# Altium PCB keyboardV0.1.PcbDoc
Units mil, origin at the board's own origin, x right, y up, seen from the top; angles counter-clockwise.
Board outline 3182.68 x 2361.92 mil, 2 copper layers (Top Layer, Bottom Layer); 69 components, 50 nets, 268 pads, 64 vias.
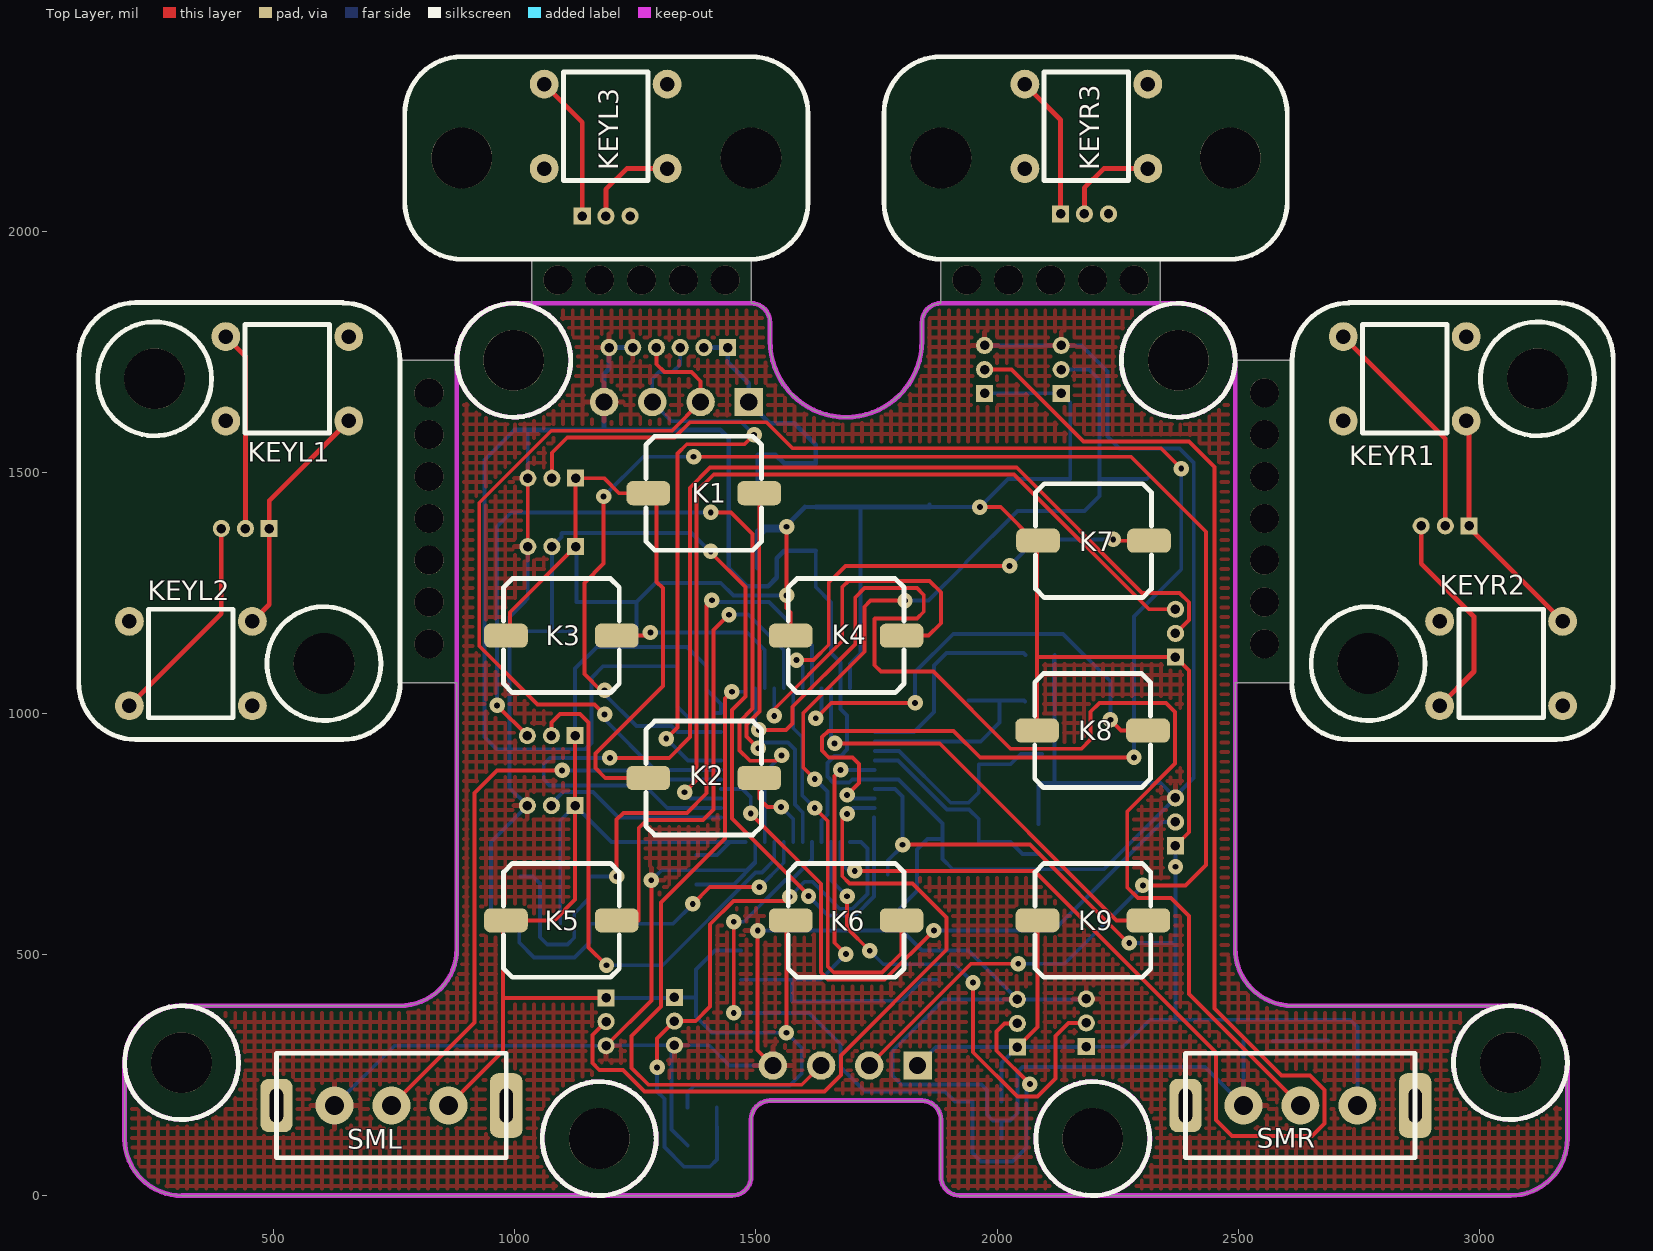
[diagram p0: Top Layer view]
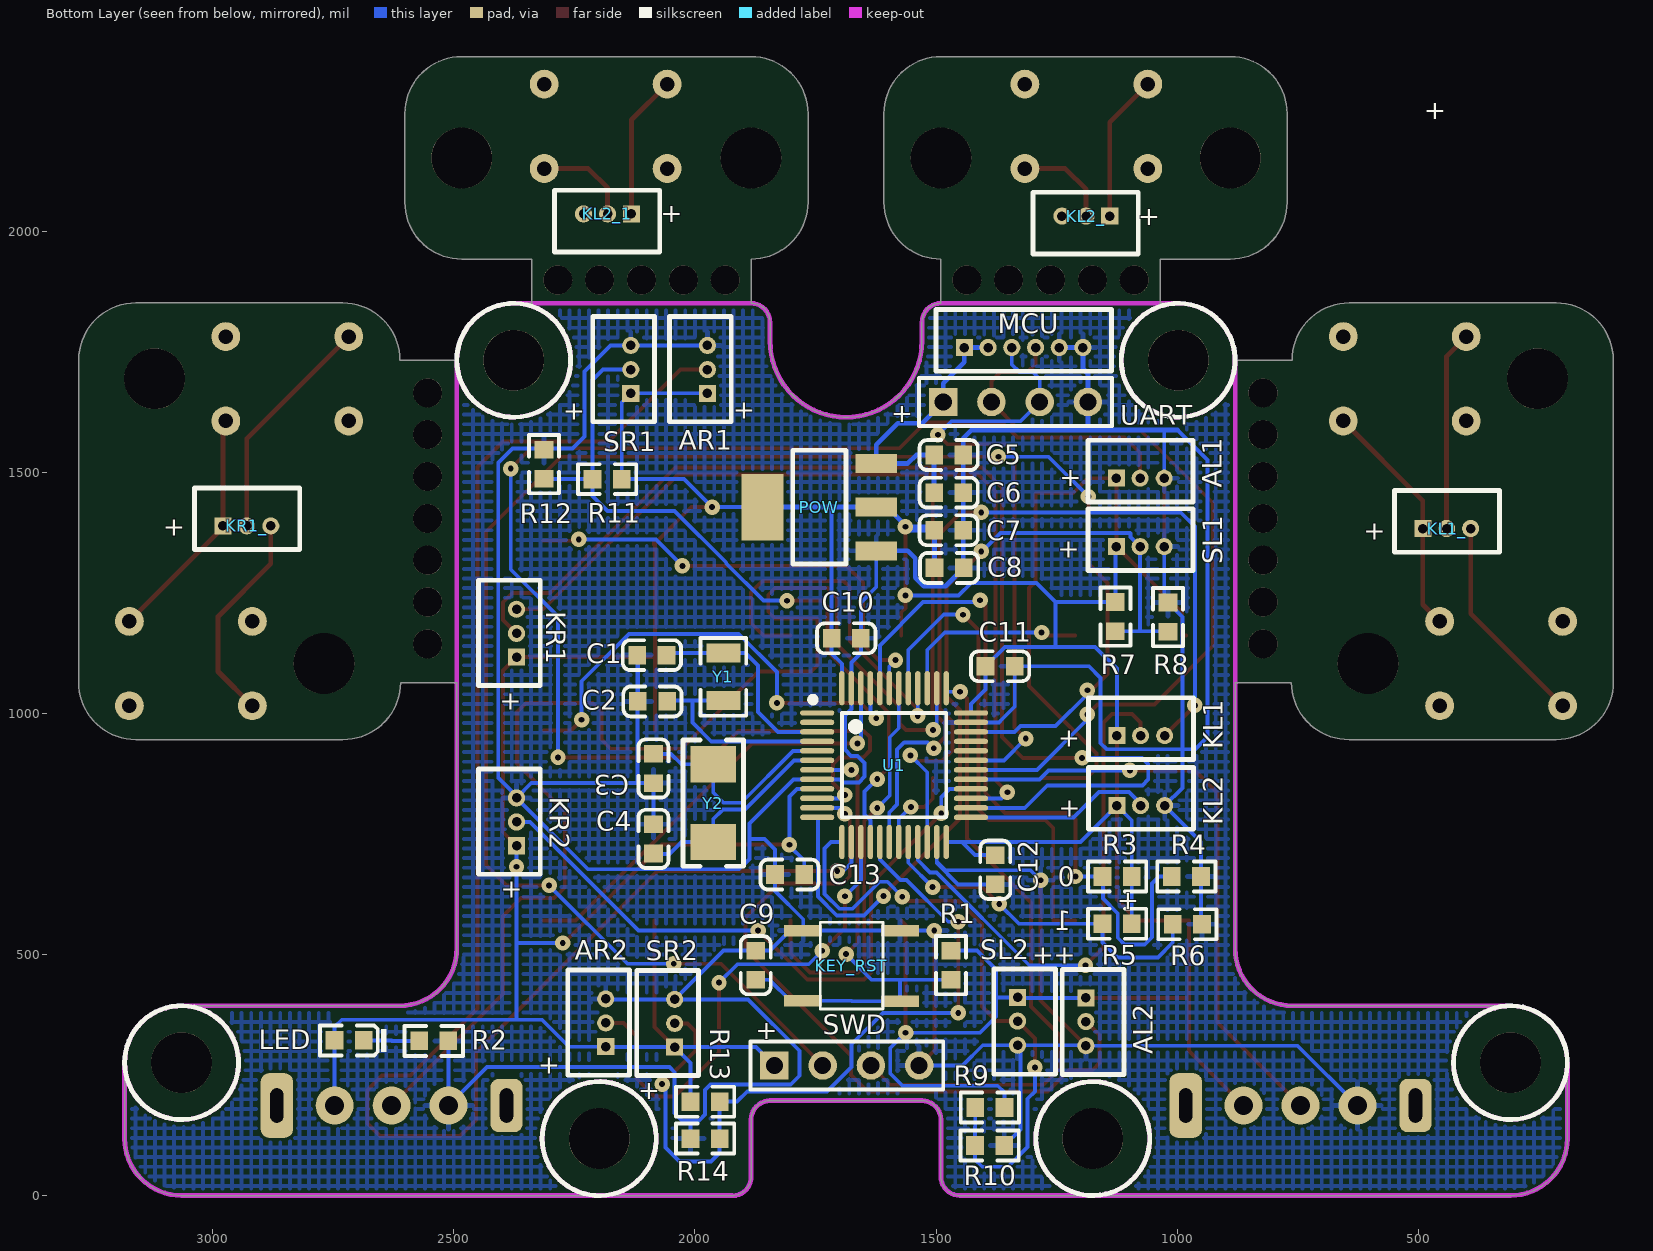
[diagram p1: Bottom Layer view, seen from below]
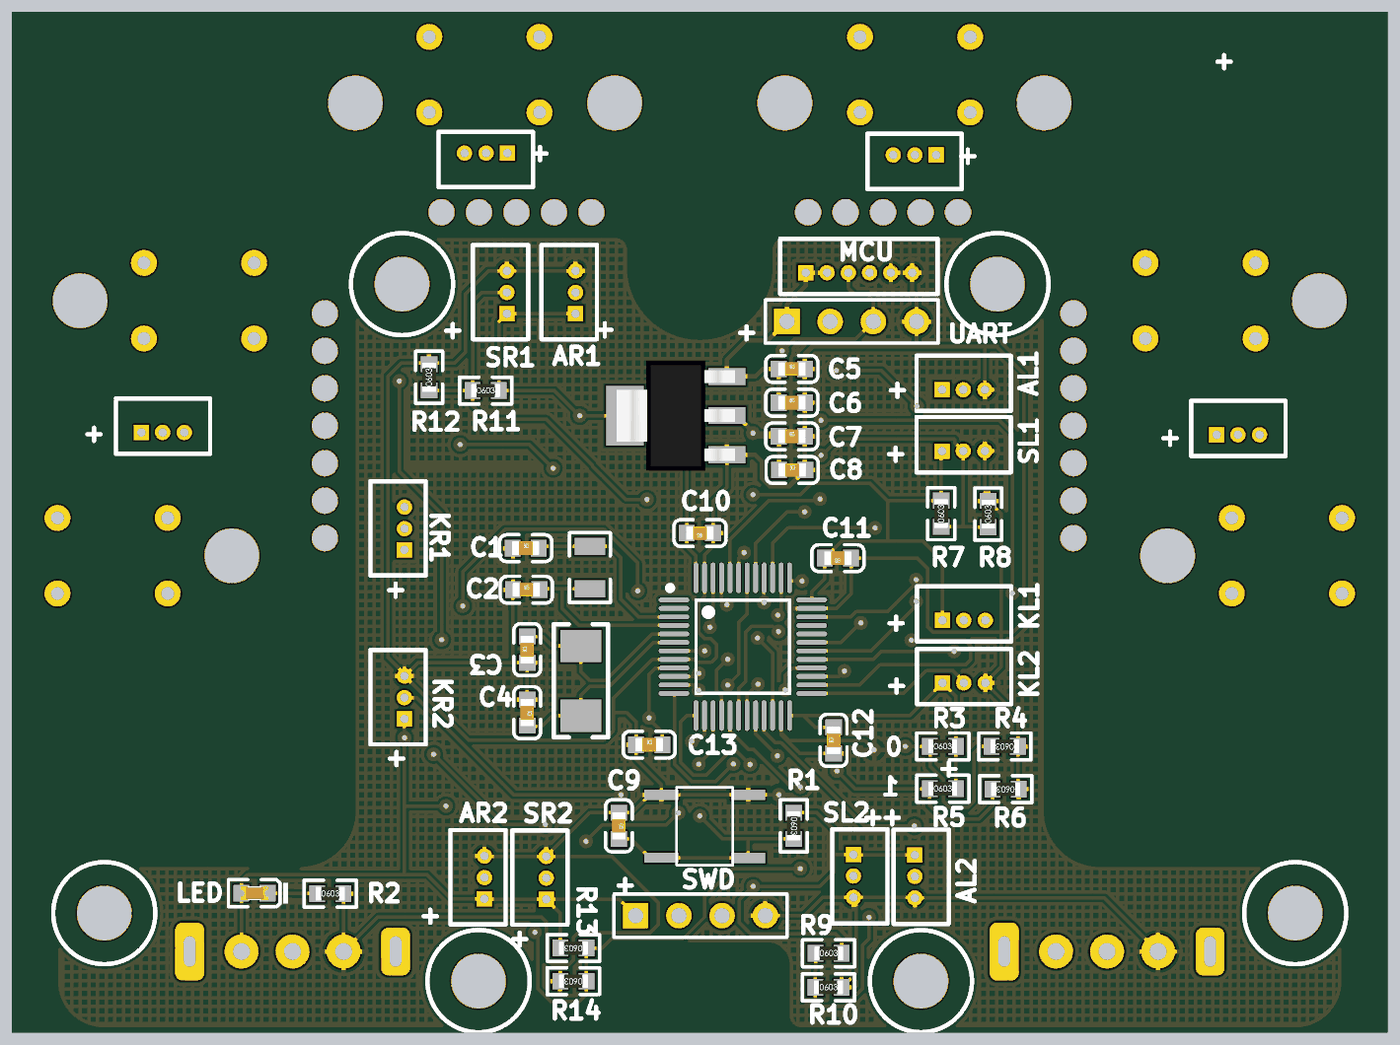
[diagram p2: 3D render of the assembled board from below, using the file's embedded part models]

## Layer stack, top to bottom
Top Solder: solder mask 0.4, Solder Resist, Dk 3.5
Top Layer: signal copper 1.4
Dielectric 1: dielectric 12.6, FR-4, Dk 4.8
Bottom Layer: signal copper 1.4
Bottom Solder: solder mask 0.4, Solder Resist, Dk 3.5

## Board outline
190.62,118.36 ccw(c308.73,118.36) 308.73,0.25 1450.46,0.25 ccw(c1450.46,39.62) 1489.83,39.62 1489.83,157.73 cw(c1529.2,157.73) 1529.2,197.1 1844.16,197.1 cw(c1844.16,157.73) 1883.53,157.73 1883.53,39.62 ccw(c1922.9,39.62) 1922.9,0.25 3064.63,0.25 ccw(c3064.63,118.36) 3182.74,118.36 3182.74,275.84 ccw(c3064.63,275.84) 3064.63,393.95 2611.88,393.95 cw(c2611.88,512.06) 2493.77,512.06 2493.77,1064 2493.87,1064.11 2610.36,1064.11 ccw(c2729.23,1064.87) 2729.99,946 3159.91,946 ccw(c3159.46,1064.55) 3278.02,1065 3278.02,1733.16 ccw(c3159.47,1732.97) 3159.28,1851.51 2729.99,1851.51 ccw(c2730.42,1732.97) 2611.88,1732.53 2493.77,1732.53 ccw(c2375.66,1732.53) 2375.66,1850.64 2338.61,1850.64 2338.61,1942.17 2483.53,1942.17 ccw(c2483.53,2060.28) 2601.64,2060.28 2601.64,2244 ccw(c2483.5,2244.03) 2483.53,2362.17 1883.53,2362.17 ccw(c1883.53,2244.06) 1765.42,2244.06 1765.42,2060.28 ccw(c1883.53,2060.28) 1883.53,1942.17 1883.53,1850.64 ccw(c1883.53,1811.27) 1844.16,1811.27 1844.16,1771.9 cw(c1686.68,1771.9) 1529.2,1771.9 1529.2,1811.27 ccw(c1489.83,1811.27) 1489.83,1850.64 1489.83,1942.17 ccw(c1489.83,2060.28) 1607.94,2060.28 1607.94,2244.06 ccw(c1489.83,2244.06) 1489.83,2362.17 889.83,2362.17 ccw(c889.86,2244.03) 771.72,2244 771.72,2060.28 ccw(c889.83,2060.28) 889.83,1942.17 1034.75,1942.17 1034.75,1850.64 997.7,1850.64 ccw(c997.7,1732.53) 879.59,1732.53 761.48,1732.53 ccw(c642.94,1732.97) 643.37,1851.51 214.08,1851.51 ccw(c213.89,1732.97) 95.34,1733.16 95.34,1065 ccw(c213.9,1064.55) 213.45,946 643.37,946 ccw(c644.13,1064.87) 763,1064.11 879.49,1064.11 879.49,512.17 879.59,512.06 cw(c761.48,512.06) 761.48,393.95 308.73,393.95 ccw(c308.73,275.84) 190.62,275.84

## Design rules (kind name [scope] priority, off if disabled: settings)
Clearance [All] p1: gap=6 ignorepadtopadclearanceinfootprint=FALSE
ComponentClearance [All] p1 off: gap=10 collisioncheckmode=3 verticalgap=10 showdistances=FALSE
HoleToHoleClearance [All] p1 off: gap=10 allowstackedmicrovias=TRUE
MinimumSolderMaskSliver [All] p1 off: minsoldermaskwidth=10
PolygonConnect [All] p1: connectstyle=Relief reliefconductorwidth=10 reliefentries=4 polygonreliefangle="90 Angle" airgapwidth=10
RoutingVias [All] p1: holewidth=12 width=32 viastyle="Through Hole" minholewidth=12 minwidth=32 maxholewidth=28 maxwidth=50
SilkToSilkClearance [All] p1 off: silktosilkclearance=10
SilkToSolderMaskClearance [IsPad] p1 off: minsilkscreentomaskgap=10 clearancetoexposedcopper=TRUE
SolderMaskExpansion [All] p1: expansion=4
UnRoutedNet [All] p1: checkbadconnections=TRUE
Width [All] p1: maxlimit=10 minlimit=6 preferedwidth=8
24 further rules are at their usual default settings.

## Classes and differential pairs
component class keyboardV0.0: AL1 AL2 AR1 AR2 C1 C2 C3 C4 C5 C6 C7 C8 C9 C10 C11 C12 C13 K1 K2 K3 K4 K5 K6 K7 K8 K9 KEY_RST KL1 KL2 KR1 KR2 LED MCU POW R1 R2 R3 R4 R5 R6 R7 R8 R9 R10 R11 R12 R13 R14 SL1 SL2 SML SMR SR1 SR2 SWD U1 UART Y1 Y2

## Components (designator, comment, footprint, x,y, rotation, side; value= is the part's Value field where it differs from the comment)
AL1 "SH1.25mm_3P" SH1.25mm_3P 1026.79,1488 r0 bottom locked
AL2 "SH1.25mm_3P" SH1.25mm_3P 1189,311 r90 bottom
AR1 "SH1.25mm_3P" SH1.25mm_3P 1974,1763.21 r270 bottom
AR2 "SH1.25mm_3P" SH1.25mm_3P 2185,408.21 r270 bottom
C1 "10PF" 0603_C 2089.32,1121 r180 bottom
C2 "10PF" 0603_C 2088,1025 r180 bottom
C3 "10PF" 0603_C 2086,886 r90 bottom
C4 "10PF" 0603_C 2086,740 r270 bottom
C5 "4.7uF" 0603_C 1473.68,1536 r180 bottom
C6 "104" 0603_C 1473.68,1458 r180 bottom
C7 "4.7uF" 0603_C 1473.68,1380 r180 bottom
C8 "104" 0603_C 1472.68,1302 r180 bottom
C9 "104" 0603_C 1874,478 r270 bottom
C10 "104" 0603_C 1686.21,1156 r0 bottom
C11 "104" 0603_C 1367,1098 r0 bottom
C12 "104" 0603_C 1377,676 r90 bottom
C13 "104" 0603_C 1803.68,666 r180 bottom
K1 "KEY_S_6*6" KEY_S_6*6 1276.73,1456.81 r0 top locked
K2 "KEY_S_6*6" KEY_S_6*6 1276.73,866.26 r0 top locked
K3 "KEY_S_6*6" KEY_S_6*6 981.46,1161.54 r0 top locked
K4 "KEY_S_6*6" KEY_S_6*6 1572.01,1161.54 r0 top locked
K5 "KEY_S_6*6" KEY_S_6*6 981.46,571 r0 top locked
K6 "KEY_S_6*6" KEY_S_6*6 1572,571 r0 top locked
K7 "KEY_S_6*6" KEY_S_6*6 2085,1358.39 r0 top locked
K8 "KEY_S_6*6" KEY_S_6*6 2083,964.68 r0 top locked
K9 "KEY_S_6*6" KEY_S_6*6 2083.82,571 r0 top locked
KEY_RST "KEY_SMT" KEY_SMT 1675,477 r180 bottom
KEYL1 "KEY" KEY_6*6#1 400.44,1781.64 r0 top locked
KEYL2 "KEY" KEY_6*6#1 200.42,1191.08 r0 top locked
KEYL3 "KEY" KEY_6*6#1 1060.83,2305.17 r0 top locked
KEYR1 "KEY" KEY_6*6#2 2972.92,1781.64 r180 top locked (schematic designator KEYL1)
KEYR2 "KEY" KEY_6*6#2 3172.94,1191.08 r180 top locked (schematic designator KEYL2)
KEYR3 "KEY" KEY_6*6#2 2312.53,2305.17 r180 top locked (schematic designator KEYL3)
KL1 "SH1.25mm_3P" SH1.25mm_3P 1025.79,954 r0 bottom locked
KL1_ "SH1.25mm_3P" SH1.25mm_3P 391.22,1383.64 r0 bottom locked
KL2 "SH1.25mm_3P" SH1.25mm_3P 1025.79,809 r0 bottom locked
KL2_ "SH1.25mm_3P" SH1.25mm_3P 1238.88,2031.6 r180 bottom locked
KL2_1 "SH1.25mm_3P" SH1.25mm_3P 2231.07,2036 r180 bottom locked (schematic designator KL2_)
KR1 "SH1.25mm_3P" SH1.25mm_3P 2370,1216.21 r270 bottom
KR1_ "SH1.25mm_3P" SH1.25mm_3P 2879.54,1389.03 r0 bottom locked
KR2 "SH1.25mm_3P" SH1.25mm_3P 2370,825 r270 bottom locked
LED "0603_LED" 0603_LED 2717,322 r0 bottom
MCU "SH1.25mm_6P" SH1.25MM_6P 1195.24,1759 r0 bottom
POW "AMS1117_3.3" SOT223 1742,1428 r180 bottom
R1 "10K" 0603_R 1469,478 r270 bottom
R2 "680R" 0603_R 2541.69,321 r180 bottom
R3 "100K" 0603_R 1124.32,662 r180 bottom
R4 "100K" 0603_R 980.68,662 r0 bottom
R5 "100K" 0603_R 1124.31,564 r180 bottom
R6 "100K" 0603_R 978.69,563 r0 bottom
R7 "10K" 0603_R 1128,1201 r90 bottom
R8 "10K" 0603_R 1019,1200 r90 bottom
R9 "10K" 0603_R 1388.32,183 r180 bottom
R10 "10K" 0603_R 1388.79,104 r180 bottom
R11 "10K" 0603_R 2182,1486 r180 bottom
R12 "10K" 0603_R 2313,1517 r90 bottom
R13 "10K" 0603_R 1979,195 r0 bottom
R14 "10K" 0603_R 1979,118.36 r0 bottom
SL1 "SH1.25mm_3P" SH1.25mm_3P 1026.79,1346 r0 bottom locked
SL2 "SH1.25mm_3P" SH1.25mm_3P 1331,312 r90 bottom
SML "SWITCH" SWITCH_SS12F44 982.11,187 r180 top locked
SMR "SWITCH" SWITCH_SS12F44 2867,187 r180 top locked
SR1 "SH1.25mm_3P" SH1.25mm_3P 2133,1763.21 r270 bottom
SR2 "SH1.25mm_3P" SH1.25mm_3P 2042,407.21 r270 bottom
SWD "Header_2.54_4P" HDR1_4P 1835,270 r180 bottom
U1 "STM32F103C8T6" LQFP48 1587,889 r180 bottom locked
UART "Header_2.54_4P" HDR1_4P 1485,1646 r180 bottom
Y1 "32.768K" XTAL_32.768_3215_2 1941,1076 r90 bottom
Y2 "8Mhz" XTAL_5032_2 1962,814 r90 bottom

## Footprints (in the part's own frame and the unit in brackets; to place one, negate y for a bottom-side part, rotate by r counter-clockwise, add the part's x,y. Pads: shape width x height; smd on the part's side, far side on the other; paste and mask are expansions set on the pad)
0603_C [mm]
  rect 0.93x0.98 smd: 1(-0.77,0) 2(0.77,0)
  silkscreen extent -1.53,-0.79 1.54,0.79, body extent -0.8,-0.4 0.8,0.4, height 0.3
0603_LED [mm]
  rect 0.93x0.98 smd: A(0.77,0) K(-0.77,0)
  silkscreen extent -1.98,-0.79 1.54,0.79, body extent -0.8,-0.4 0.8,0.4, height 0.6
0603_R [mm]
  rect 0.93x0.98 smd: 1(-0.77,0) 2(0.77,0)
  silkscreen extent -1.54,-0.79 1.54,0.79, body extent -0.85,-0.4 0.85,0.4, height 0.56
HDR1_4P [mm]
  rect 1.5x1.5 hole 0.9: 1(0,0)
  round 1.5 hole 0.9: 2(2.54,0) 3(5.08,0) 4(7.62,0)
  silkscreen extent -1.27,-1.27 8.89,1.27
KEY_6*6#1 [mil]
  round 60 hole 30: 1(0,0) 2(255,0) 3(0,-175) 4(255,-175)
  silkscreen extent 40,-200 215,25
KEY_6*6#2 [mil]
  round 60 hole 30: 1(0,0) 2(255,0) 3(0,175) 4(255,175)
  silkscreen extent 40,-25 215,200
KEY_S_6*6 [mm]
  rrect50% 2.3x1.27 smd: 1(0,0) 2(5.842,0)
  silkscreen extent -0.13,-3 5.97,3
KEY_SMT [mm]
  rect 2x0.6 smd: 1(-2.55,-1.85) 1(2.55,-1.87) 2(-2.55,1.85) 2(2.55,1.85)
  silkscreen extent -1.65,-2.29 1.65,2.29
LQFP48 [mm]
  oval 1.8x0.28 smd mask+0.051: 1(-4.05,2.85) 2(-4.05,2.35) 3(-4.05,1.85) 4(-4.05,1.35) 5(-4.05,0.85) 6(-4.05,0.35) 7(-4.05,-0.15) 8(-4.05,-0.65) 9(-4.05,-1.15) 10(-4.05,-1.65) 11(-4.05,-2.15) 12(-4.05,-2.65) 25(4.05,-2.65) 26(4.05,-2.15) 27(4.05,-1.65) 28(4.05,-1.15) 29(4.05,-0.65) 30(4.05,-0.15) 31(4.05,0.35) 32(4.05,0.85) 33(4.05,1.35) 34(4.05,1.85) 35(4.05,2.35) 36(4.05,2.85)
  oval 0.28x1.8 smd mask+0.051: 13(-2.75,-3.95) 14(-2.25,-3.95) 15(-1.75,-3.95) 16(-1.25,-3.95) 17(-0.75,-3.95) 18(-0.25,-3.95) 19(0.25,-3.95) 20(0.75,-3.95) 21(1.25,-3.95) 22(1.75,-3.95) 23(2.25,-3.95) 24(2.75,-3.95) 37(2.75,4.15) 38(2.25,4.15) 39(1.75,4.15) 40(1.25,4.15) 41(0.75,4.15) 42(0.25,4.15) 43(-0.25,4.15) 44(-0.75,4.15) 45(-1.25,4.15) 46(-1.75,4.15) 47(-2.25,4.15) 48(-2.75,4.15)
  silkscreen extent -4.43,-2.65 2.75,3.7
SH1.25mm_3P [mm]
  rect 0.9x0.9 hole 0.5: 1(2.52,0)
  round 0.9 hole 0.5: 2(1.27,0) 3(0,0)
  silkscreen extent -1.52,-2 4.02,1.25
SH1.25MM_6P [mm]
  rect 0.9x0.9 hole 0.5: 1(6.25,0)
  round 0.9 hole 0.5: 2(5,0) 3(3.75,0) 4(2.5,0) 5(1.25,0) 6(0,0)
  silkscreen extent -1.5,-2 7.75,1.25
SOT223 [mm]
  rect 2.2x1 smd: 1(3,-2.3) 2(3,0) 3(3,2.3)
  rect 2.2x3.5 smd: 2(-3,0)
  silkscreen extent -1.4,-3 1.4,3, body extent -3.49,-3.24 3.49,3.24, height 1.64
SWITCH_SS12F44 [mm]
  rrect50% 1.7x3.4 hole 0.7 slot 1.8 at 90 deg: 0(0,0)
  rrect50% 1.7x2.8 hole 0.7 slot 1.8 at 90 deg: 0(12.1,0)
  round 2 hole 1: 1(3.045,0) 2(6.045,0) 3(9.045,0)
  silkscreen extent 0,-2.75 12.1,2.75
XTAL_32.768_3215_2 [mm]
  rect 1x1.8 smd: 1(-1.25,0) 2(1.25,0)
  silkscreen extent -2.05,-1.2 2.05,1.2
XTAL_5032_2 [mm]
  rect 1.9x2.4 smd: 1(-2.05,0) 2(2.05,0)
  silkscreen extent -3.33,-1.6 3.33,1.6

## Part data
C1 C2 C3 C4 C5 C6 C7 C8 C9 C10 C11 C12 C13: library part 0603_CAP
KEYL1 KEYL2 KEYL3 KEYR1 KEYR2 KEYR3: library part KEY_6*6
R1 R2 R3 R4 R5 R6 R7 R8 R9 R10 R11 R12 R13 R14: library part 0603_RES
SML SMR: library part SWITCH_SS12F44
Y1: library part XTAL_32.768_3215_2
Y2: library part XTAL_8MHz_5032_2

## Free pads (board coordinates)
  round 125.98 hole 125.98: 0(252.82,1694.03) 0(308.73,275.84) 0(604,1103.48) 0(889.83,2152.17) 0(997.7,1732.53) 0(1174.87,118.36) 0(1489.83,2152.17) 0(1883.53,2152.17) 0(2198.49,118.36) 0(2375.66,1732.53) 0(2483.53,2152.17) 0(2769.36,1103.48) 0(3064.63,275.84) 0(3120.54,1694.03)
  round 60 hole 60: 0(822,1144.38) 0(822,1231.15) 0(822,1317.92) 0(822,1404.69) 0(822,1491.46) 0(822,1578.23) 0(822,1665) 0(1089,1899) 0(1175.77,1899) 0(1262.54,1899) 0(1349.31,1899) 0(1436.08,1899) 0(1937.28,1899) 0(2024.05,1899) 0(2110.82,1899) 0(2197.59,1899) 0(2284.36,1899) 0(2554.28,1144.38) 0(2554.28,1231.15) 0(2554.28,1317.92) 0(2554.28,1404.69) 0(2554.28,1491.46) 0(2554.28,1578.23) 0(2554.28,1665)

## Via types
v1: diameter 32, hole 12, Top Layer to Bottom Layer, tented both sides, 64 vias

## Nets (pads, with @x,y where several pads share a name; then routed paths per layer and width w, separated by ;. In a path a pad name is that pad's centre, name@x,y a point inside that pad or via, vN(x,y) a via of type N, cw(c..) or ccw(c..) an arc to the next point about the centre after c; other vN are vias at no path point)
3V3: AL1.1 AL2.1 AR1.1 AR2.1 C7.1 C8.1 C10.2 C11.2 C12.2 C13.2 K1.1 K2.1 K3.1 K4.1 K5.1 K6.1 K7.1 K8.1 K9.1 KL1.1 KL2.1 KR1.1 KR2.1 LED.A POW.2 R1.1 R3.2 R5.2 R7.2 R9.2 R11.2 R13.2 SL1.1 SL2.1 SML.1 SMR.1 SR1.1 SR2.1 SWD.1 U1.9 U1.24 U1.36 U1.48 | length 11635.3
  Top Layer w8: SML.1 975,299.78 975,411 ; K3.1 990,1161.54 990,1210 SL1.1 AL1.1 1185,1488 1216.19,1456.81 K1.1 1294,1456.81 1294,1273 1307,1260 1307,1057 1167,917 1167,886.76 1187.5,866.26 K2.1 ; KL1.1 KL2.1 1125,614 1082,571 K5.1 975,571 975,411 ; AL2.1 975.79,410.21 975,411 ; v1(1563,338) 1563,562 K6.1 ; v1(1563.5,1387.5) v1(1563.5,1245) 1563.5,1218.5 1572.01,1209.99 K4.1 ; v1(1804,728) 2068,728 2272,524 v1(2274,524) ; v1(1964.5,1428) 2007.5,1428 K7.1@2083,1352.5 ; SR2.1 2083.82,349.82 K9.1 ; K8.1 2083,1117 ; K7.1@2083,1358.39 K7.1@2083,1352.5 ; K7.1 2085,1350.5 K7.1@2083,1352.5 ; KR2.1 2398,753.79 2398,1089 KR1.1 2083,1117 ; 2083,1117 K7.1@2083,1352.5
  Bottom Layer w8: R5.2 R3.2 1094,778 KL2.1 1200.51,733.49 1446.49,733.49 ; KL1.1 1125,1093 1170,1138 1252,1138 ; SL1.1 1128,1344 R7.2 1252,1231.32 ; AL2.1 1322,410.21 1323,411.21 SL2.1 1375.79,411.21 ; R9.2 1358,214 1372,228 1569.5,228 1595,253.5 1595,306 v1(1563,338) ; C12.2 1419.32,706.32 1446.49,733.49 ; U1.36@1413,1001.2 U1.36 1427.55,1019.45 1397.32,1049.69 C11.2 1357.32,1138 1252,1138 ; R1.1 1415.31,508.31 1375.79,468.79 1375.79,411.21 ; U1.24 1446.49,733.49 ; C8.1 C7.1@1503,1362.5 ; C7.1@1503,1379 C7.1 ; C7.1@1515.5,1375 C7.1@1503,1362.5 ; v1@1562.5,349 1562.5,338.5 v1(1563,338) ; v1(1563.5,1245) 1453,1245 1427,1271 1291.68,1271 1252,1231.32 ; v1(1563.5,1387.5) 1515.5,1387.5 1503,1375 C7.1@1503,1362.5 ; POW.2@1601,1428 POW.2@1623.89,1428 ; U1.48 1695.27,1103.27 1716.53,1124.53 C10.2 1716.53,1428 ; C13.2 1773.37,694.86 1804,725.49 1804,828 1788.28,843.72 U1.9 1789.19,842.81 ; SWD.1 1873,308 SR2.1 ; POW.2@1860.11,1434 1860.11,1428 v1(1964.5,1428) 2022.5,1486 R11.2 2151.68,1645.32 SR1.1 AR1.1 ; R13.2 2009.32,275.32 SR2.1 ; v1(2274,524) 2369,524 2370,525 ; KR2.1 v1(2370,682) 2370,525 ; SMR.1 2747.11,254 2747.32,254.21 LED.A 2747.32,350 2732.32,365 2370,365 ; 1252,1138 1252,1231.32 ; 1375.79,411.21 1375.79,371.21 1409,338 v1(1563,338) ; SR2.1 2184,308 AR2.1 2261,309 2317,365 2370,365 ; 2370,365 2370,525
  Bottom Layer w10: C8.1 C7.1@1503,1379 ; C7.1 1553,1380 POW.2@1601,1428 ; POW.2@1623.89,1428 POW.2@1860.11,1428
5V: C5.1 C6.1 MCU.1 MCU.2 POW.3 UART.1 | length 599.7
  Bottom Layer w10: MCU.2 MCU.1 1441.3,1728.7 1485,1685 UART.1 1529,1602 1579,1602 1623.89,1557.11 POW.3 1558.45,1518.55 1541,1536 C5.1 C6.1
AL1: AL1.2 U1.10 | length 2989.9
  Top Layer w8: AL1.2 1076.79,1540.79 1108.5,1572.5 1331.3,1572.5 1362.8,1604 1522,1604 1576,1550 2340,1550 v1(2382,1508) ; v1(1689,831) 1713.85,855.85 1713.85,895.25 1700,909.09 1650.91,909.09 1637,923 1637,951 1650,964 1910,964 1965,909 v1(2284,909)
  Bottom Layer w8: v1(1689,831) 1695.96,824.04 U1.10 ; v1(2284,909) 2284,1201 2382,1299 v1(2382,1508)
AL2: AL2.2 U1.11 | length 1516.4
  Top Layer w8: AL2.2 1161,333 1161,275 1175,261 1224.01,261 1269.01,216 1642,216 1676,250 1676,291 1895,510 1895,577 1824.76,647.24 1694.26,647.24 1679,662.5 1679,781.85 v1(1689,791.85)
  Bottom Layer w8: v1(1689,791.85) 1701.5,804.35 U1.11
AL3: R7.1 R8.1 SL1.2 U1.12 | length 1800.9
  Top Layer w8: v1(1406,1336.25) 1406,1334.5 1478.5,1262 1478.5,1035.47 1450.09,1007.07 1450.09,782.16 1608.85,623.41 v1(1608.85,621.39)
  Bottom Layer w8: R8.1 1074,1170.69 1076.79,1170.69 ; R7.1 1076.79,1170.69 ; v1(1406,1336.25) 1404.25,1336.25 1366.5,1374 1097.79,1374 1096.79,1373 1096.79,1366 SL1.2 1076.79,1170.69 ; v1(1608.85,621.39) 1649.24,581 1705.8,581 1745,620.2 U1.12@1745,784.67
AL4: R9.1 R10.1 SL2.2 U1.13 | length 1341.3
  Top Layer w8: v1(1570,620) 1561,611 1453,611 1405,563 1405,392 1375,362 SL2.2 1295,326 v1(1295,266) ; v1(1295,266) 1295,258 1303,266 v1(1295,266)
  Bottom Layer w8: v1(1295,266) 1295,216 1310,201 1310,100.73 1350.73,60 1404.1,60 1419.1,75 R10.1 1419.1,143 1418.63,143.47 R9.1 ; v1(1570,620) 1601,651 1617.3,651 1673.3,595 1700,595 1731,626 1731,720 1717.51,733.49 U1.13
AR1: AR1.2 U1.14 | length 3424.6
  Top Layer w8: v1(1705,673.5) 2077.5,673.5 2454,297 2454,157 2487,124 2653,124 2679,150 2679,219 2649,249 2590,249 2451,388 2451,1511 2398,1564 2179,1564 2029.79,1713.21 AR1.2
  Bottom Layer w8: U1.14 1675.58,690.42 1692.5,673.5 v1(1705,673.5)
AR2: AR2.2 U1.15 | length 1032.5
  Top Layer w8: v1(1689,621) 1689,555 v1(1736,508) ; v1(1950,442) 1950,297.5 2042,205.5 2083.5,205.5 2120.81,242.81 2120.81,331.03 2148,358.21 AR2.2
  Bottom Layer w8: U1.15 1655.9,654.1 v1(1689,621) ; v1(1736,508) 1764,480 1912,480 v1(1950,442)
AR3: R11.1 R12.1 SR1.2 U1.16 | length 1580.3
  Top Layer w8: v1(1622,864) 1598,888 1598,1001 1725,1128 1725,1221.5 1737.5,1234 v1(1809,1234)
  Bottom Layer w8: v1(1622,864) 1648,838 1648,790.5 1636.21,778.71 U1.16 ; v1(1809,1234) 1858,1234 1935,1311 1935,1312.77 2042.23,1420 2181,1420 2212.31,1451.31 R11.1 ; SR1.2 2190.79,1713.21 2212.31,1691.69 R11.1 ; R12.1@2313,1489 2310,1486 R11.1
AR4: R13.1 R14.1 SR2.2 U1.17 | length 1599.5
  Top Layer w8: v1(1454,379) v1(1454,568) ; SR2.2 2015.49,357.21 1999,340.72 1999,300.5 v1(2068,231.5)
  Bottom Layer w8: v1(1454,379) 1610,379 1675,314 1675,267 1726,216 1891.5,216 1912.5,195 R13.1 R14.1 1948.69,88.81 1966.5,71 2032,71 2061,100 2061,224.5 v1(2068,231.5) ; v1(1454,568) 1474.5,568 1561.5,655 1574,655 1616.53,697.53 U1.17
BOOT0: R3.1 R4.2 U1.44 | length 1505.6
  Top Layer w8: v1(1211,662) 1211,780 1225,794 1357,794 1397.5,834.5 1397.5,1224 v1(1408.5,1235)
  Bottom Layer w8: R4.2 1037.5,662 1052,647.5 1052,536 1067,521 1109,521 1123,535 1123,585 1154,616 R3.1@1154,662 ; R3.1 v1(1211,662) ; v1(1408.5,1235) 1412.5,1231 1526.77,1231 1616.53,1141.24 U1.44
BOOT1: R5.1 R6.2 U1.20 | length 746.6
  Top Layer w8: v1(1369,605) 1404,640 v1(1507,640)
  Bottom Layer w8: R6.2 1009,525 1040,494 1123.63,494 1154.63,525 R5.1 1328,564 v1(1369,605) ; v1(1507,640) 1557.47,690.47 U1.20
GND: AL1.3 AL2.3 AR1.3 AR2.3 C1.1 C2.1 C3.1 C4.1 C5.2 C6.2 C7.2 C8.2 C9.1 C10.1 C11.1 C12.1 C13.1 KEY_RST.2 KL2.3 KR2.3 MCU.5 MCU.6 POW.1 R2.2 R4.1 R6.1 R8.2 R10.2 R12.2 R14.2 SL1.3 SL2.3 SML.3 SMR.3 SR1.3 SR2.3 SWD.4 U1.8 U1.23 U1.35 U1.47 UART.4 | length 12258.1
  Top Layer w8: SL1.3 AL1.3 ; AL2.3 1283,405 v1(1283,654) ; v1(1503.5,549.83) 1503.5,301.5 SWD.4
  Bottom Layer w8: SML.3 750,311 AL2.3 1197,311 1198,312 SL2.3 ; R6.1 950.37,563 R4.1 950.37,733.58 KL2.3 989,845.79 989,926 ; 999,1588 937,1526 937,951 962,926 989,926 ; SL1.3 1026.79,1238.1 R8.2 989,1200.32 989,926 ; AL1.3 1026.79,1586.79 1028,1588 ; v1(1283,654) 1303.83,674.83 1479.83,674.83 1498.42,693.42 U1.23 1498.42,689.67 1454.43,645.69 C12.1 ; R10.2 1325,137.47 1325,306 SL2.3 ; U1.35 1369.48,981.52 1362,989 1336.69,1014.32 C11.1 1183,1098 1159,1074 1159,938.42 1146.58,926 989,926 ; C5.2@1442.37,1541.63 C8.2 C8.2@1443.37,1303 ; v1(1503.5,549.83) 1574.61,549.83 KEY_RST.2@1775.39,549.83 ; SWD.4 1445,270 1403,312 SL2.3 ; POW.1 1623.89,1262.01 1655.9,1230 C10.1 1655.9,1125.1 1675.58,1105.42 U1.47 1675.58,1009.28 1689,995.86 1689,925 1676,912 1662.5,912 1648,897.5 1648,869.09 1660,857.09 1693.36,857.09 1699.67,863.41 U1.8 1795.59,863.41 1887,772 1887,740 ; AR1.3 SR1.3 2175.1,1763.21 2229,1709.31 2229,1574.5 2253.87,1549.63 2378,1549.63 2408,1519.63 2408,867.38 2367.81,827.19 2339.31,855.69 C3.1 2086,817 C4.1 ; R14.2 2009.32,155.68 2009,156 ; 2119,857.09 2119,1024.31 C2.1 2118.31,1119.68 C1.1 2119.63,978.37 ; AR2.3 2184,407.21 SR2.3 ; KR2.3 2222,677 1908,677 1887,698 1887,740 ; R2.2 2511.37,253.48 2510.89,253 SMR.3 2430.89,267 2053,267 2042,256 2042,171 2027,156 2009,156 ; KEY_RST.2@1775.39,549.83 1775.39,573.39 1834,632 C13.1 1834,718 1856,740 1887,740 ; KEY_RST.2@1775.39,549.83 1803,549.83 1844.52,508.32 C9.1 1940.9,508.32 SR2.3 ; 2009,156 1991,156 1979,168 1979,219 1967.53,230.47 1801.33,230.47 1783,248.8 1783,300.5 1889.71,407.21 SR2.3
  Bottom Layer w10: 999,1588 1028,1588 1185,1588 ; MCU.5 MCU.6 1195.24,1715 1185,1704.76 UART.4 1185,1588 ; C8.2 1480.37,1264 1525,1264 1543,1282 1543,1322 1558.45,1337.45 POW.1 ; C8.2@1443.37,1303 C7.2 C6.2 C5.2 1443.37,1570.63 1426,1588 1201,1588 1185,1588
K1: K1.2 U1.18 | length 836.4
  Top Layer w8: v1(1504.5,928) 1480,952.5 1480,977.18 1507,1004.18 1507,1130.88 1506.73,1131.15 K1.2
  Bottom Layer w8: v1(1504.5,928) 1505,927.5 1517.48,939.98 1566.02,939.98 1581,925 1581,811 1596.84,795.16 U1.18
K2: K2.2 U1.19 | length 178.4
  Top Layer w8: K2.2 1506.73,823.27 1523.84,806.16 v1(1552,806.16)
  Bottom Layer w8: v1(1552,806.16) 1577.16,781 U1.19
K3: K3.2 U1.39 | length 403.8
  Top Layer w8: K3.2 1274.54,1161.54 v1(1281,1168)
  Bottom Layer w8: v1(1281,1168) 1482,1168 1518.1,1131.9 U1.39
K4: K4.2 U1.40 | length 759.3
  Top Layer w8: v1(1537.79,995) 1537.79,1008.73 1679.02,1149.96 1679.02,1262.5 1691.52,1275 1860,1275 1883.53,1251.47 1883.53,1187.07 1858,1161.54 K4.2
  Bottom Layer w8: v1(1537.79,995) U1.40
K5: K5.2 U1.41 | length 1048.3
  Top Layer w8: K5.2 1257,571 1257,762.5 1273.5,779 1390,779 1412.1,801.1 1412.1,1173.1 v1(1444,1205)
  Bottom Layer w8: v1(1444,1205) 1484,1205 1557.47,1131.53 U1.41
K6: K6.2 U1.42 | length 850.3
  Top Layer w8: v1(1622,804) 1648.85,777.15 1648.85,475 1661.35,462.5 1761.7,462.5 1802,502.8 K6.2
  Bottom Layer w8: U1.42 1577.16,969.49 1596,950.65 1596,830 v1(1622,804)
K7: K7.2 U1.43 | length 975
  Top Layer w8: v1(1584,1110.84) 1619.24,1110.84 1650.93,1142.53 1650.93,1271.43 1685.5,1306 v1(2026,1306) ; v1(2241,1361) 2243.61,1358.39 K7.2
  Bottom Layer w8: v1(1584,1110.84) 1596.84,1098 U1.43 ; v1(2026,1306) 2081,1361 v1(2241,1361)
K8: K8.2 U1.45 | length 996.3
  Top Layer w8: v1(1624,990) 1656,1022 v1(1830,1022) ; v1(2235,987) 2257.31,964.69 K8.2
  Bottom Layer w8: v1(1624,990) 1636.21,1002.21 U1.45 ; v1(1830,1022) 1830,1086 1909,1165 2137,1165 2235,1067 v1(2235,987)
K9: K9.2 U1.46 | length 920.2
  Top Layer w8: v1(1663,938) 1881,938 2248,571 K9.2
  Bottom Layer w8: U1.46 1655.9,945.1 v1(1663,938)
KL1: KL1.2 U1.21 | length 1113
  Top Layer w8: KL1.2 1075.79,981 1093.79,999 1135,999 1153,981 1153,515 v1(1190,478)
  Bottom Layer w8: v1(1190,478) 1306.55,478 1499.05,670.5 1512.29,670.5 1537.79,696 U1.21
KL2: KL1.3 U1.22 | length 1774.5
  Top Layer w8: v1(963,1016.79) KL1.3 ; v1(1406,1417) 1448,1417 1492.73,1372.27 1492.73,1125.35 1493,1125.08 1493,1009.98 1466,982.98 1466,923.5 1487.5,902 1542,902 v1(1553,913)
  Bottom Layer w8: v1(963,1016.79) 963,1387.5 992.5,1417 v1(1406,1417) ; U1.22 1518.1,878.1 v1(1553,913)
KL3: KL2.2 U1.25 | length 387.5
  Bottom Layer w8: KL2.2 1075.79,813.29 1099.5,837 1162.29,837 1214.62,784.67 U1.25
KR1: KR1.2 U1.26 | length 2511.3
  Top Layer w8: v1(1197,908) 1320,908 1363,951 1363,1468.28 1404.72,1510 2040.9,1510 2300.9,1250 2378.66,1250 2398,1230.66 2398,1194.21 KR1.2
  Bottom Layer w8: v1(1197,908) 1073,908 1060,895 1060,863 1072,851 1269.41,851 1316.06,804.35 U1.26
KR2: KR1.3 U1.27 | length 1838.7
  Top Layer w8: v1(1352,836.5) 1377,861.5 1377,1460.63 1412.37,1496 2035.1,1496 2314.89,1216.21 KR1.3
  Bottom Layer w8: v1(1352,836.5) 1364.46,824.04 U1.27
KR3: KR2.2 U1.28 | length 1369.7
  Top Layer w8: v1(1489,792.85) 1634.85,647 1634.85,462.5 1649.35,448 1767,448 v1(1869,550)
  Bottom Layer w8: U1.28 1472,843.72 1489,826.72 v1(1489,792.85) ; v1(1869,550) 2117,550 2342,775 KR2.2
NetC1_2: C1.2 U1.3 Y1.2 | length 438.5
  Bottom Layer w8: U1.3 1827.83,961.83 1869,1003 1869,1099.42 1894.79,1125.21 Y1.2 2054.79,1125.21 C1.2
NetC2_2: C2.2 U1.4 Y1.1 | length 437.9
  Bottom Layer w8: U1.4 1966.15,942.15 2005,981 2005,1026.79 ; Y1.1 2005,1026.79 ; C2.2 2055.9,1026.79 2005,1026.79
NetC3_2: C3.2 U1.5 Y2.2 | length 467.4
  Bottom Layer w8: U1.5 1796.54,922.46 1904,815 1941,815 1962,836 Y2.2 2027.71,894.71 2049.32,916.32 C3.2 C3.2@2093,916.32
NetC4_2: C4.2 U1.6 Y2.1 | length 449.1
  Bottom Layer w8: U1.6 1794.22,902.78 1896,801 1942,801 1962,781 Y2.1 2027.71,733.29 2052.49,708.51 2086,708.51 C4.2
NetKEYL1_2: 
NetKEYL1_3: 
NetKEYL2_3: 
NetKEYL3_1: 
NetKEYL3_4: 
NetKEYR1_2: 
NetKEYR1_3: 
NetKEYR2_3: 
NetKEYR3_1: 
NetKEYR3_4: 
NetLED_K: LED.K R2.1 | length 115.1
  Bottom Layer w8: R2.1 2628,321 2629,322 LED.K
NRST: C9.2 KEY_RST.1 R1.2 U1.7 | length 1070.5
  Top Layer w8: v1(1675.35,883.09) 1662.85,870.59 1662.85,524.65 v1(1686.5,501)
  Bottom Layer w8: R1.2 1573,447.68 ; v1(1675.35,883.09) U1.7 ; v1(1686.5,501) 1633.18,447.68 1573,447.68 ; C9.2 1845.52,447.69 1802,404.17 1775.39,404.17 1674.79,404.17 1674,403.38 1574.61,403.38 1574.61,446.08 1573,447.68
RX: MCU.3 U1.31 UART.3 | length 1300.5
  Top Layer w8: v1(1314,948) 1337,971 1337,1539 1356.5,1558.5 1476.5,1558.5 v1(1496,1578)
  Bottom Layer w8: v1(1314,948) 1359.22,902.78 U1.31 ; MCU.3 1342.87,1723.87 1327,1708 1299,1708 1285,1694 UART.3 1325,1606 1468,1606 v1(1496,1578)
SWCLK: SWD.3 U1.37 | length 1326.3
  Top Layer w8: v1(1450,1045) 1436,1031 1436,741 1303,608 1303,392.44 1242,331.44 1242,265 1277,230 1595,230 SWD.3
  Bottom Layer w8: v1(1450,1045) 1478.73,1045 U1.37
SWDIO: SWD.2 U1.34 | length 3631.5
  Top Layer w8: v1(1184,1450) 1184,1311 1144,1271 1144,1082 1178,1048 v1(1186,1048) ; v1(1370.5,1532.5) 2277.5,1532.5 2433,1377 2433,686 2390.5,643.5 v1(2302.5,643.5) ; SWD.2 1946,481 v1(2044,481)
  Bottom Layer w8: v1(1184,1450) 1266.5,1532.5 v1(1370.5,1532.5) ; v1(1186,1048) 1186,1040 1252,974 1324.77,974 1336.94,961.83 U1.34 ; v1(2044,481) 2140,481 v1(2302.5,643.5)
SWL: SML.2 U1.29 | length 1257.9
  Top Layer w8: SML.2 916,358.89 916,835 963,882 v1(1098,882)
  Bottom Layer w8: v1(1098,882) 1266.84,882 1285.43,863.41 U1.29
SWR: SMR.2 U1.38 | length 2696.9
  Top Layer w8: v1(1506,966) 1562.5,966 1576,979.5 1576,1014 1706,1144 1706,1241 1725,1260 1834,1260 1848,1246 1848,1211 1834,1197 1747,1197 1746,1196 1746,1100 1759,1087 1868,1087 2028,927 2175,927 2194,946 2194,1003.5 2212.5,1022 2350,1022 2369,1003 2369,896 2270,797 2270,639.23 2292.23,617 2361,617 2398,580 2398,418 SMR.2
  Bottom Layer w8: U1.38 1498.42,973.58 v1(1506,966)
TX: MCU.4 U1.30 UART.2 | length 1640.1
  Top Layer w8: v1(1186,998) 1165,1019 1046.9,1019 926,1139.9 926,1437 1075.5,1586.5 1325.5,1586.5 UART.2 1385,1689 1366,1708 1310,1708 1293.66,1724.34 MCU.4
  Bottom Layer w8: v1(1186,998) 1186,988 1290.91,883.09 U1.30
pads on no net: KEYL1.1 KEYL1.2 KEYL1.3 KEYL1.4 KEYL2.1 KEYL2.2 KEYL2.3 KEYL2.4 KEYL3.1 KEYL3.2 KEYL3.3 KEYL3.4 KEYR1.1 KEYR1.2 KEYR1.3 KEYR1.4 KEYR2.1 KEYR2.2 KEYR2.3 KEYR2.4 KEYR3.1 KEYR3.2 KEYR3.3 KEYR3.4 KL1_.1 KL1_.2 KL1_.3 KL2_1.1 KL2_1.2 KL2_1.3 KL2_.1 KL2_.2 KL2_.3 KR1_.1 KR1_.2 KR1_.3 SML.0 SMR.0 U1.1 U1.2 U1.32 U1.33
copper on no net: | length 3786.5
  Top Layer w10: 200.42,1016.08 391.22,1206.88 391.22,1383.64 ; 400.44,1781.64 441.22,1740.85 441.22,1383.64 ; 455.42,1191.08 490.44,1226.09 490.44,1383.64 490.44,1441.64 655.44,1606.64 ; 1060.83,2305.17 1139.67,2226.33 1139.67,2031.6 ; 1188.88,2031.6 1188.88,2086.89 1232.17,2130.17 1315.83,2130.17 ; 2057.53,2305.17 2131.85,2230.85 2131.85,2036 ; 2181.07,2036 2181.07,2090.07 2221.17,2130.17 2312.53,2130.17 ; 2717.92,1781.64 2929.54,1570.02 2929.54,1389.03 ; 2879.54,1389.03 2879.54,1310.46 2989,1201 2989,1087.14 2917.94,1016.08 ; 2978.75,1600.81 2978.75,1389.03 2978.75,1385.27 3172.94,1191.08

## Polygon pours and split planes (outlines as drawn)
GND on Top Layer "Top Layer-No Net" (hatched 90Degree grid 20 track 8, remove dead copper, pour order 0): 190.62,118.36 ccw(c308.73,118.36) 308.73,0.25 1450.46,0.25 ccw(c1450.46,39.62) 1489.83,39.62 1489.83,157.73 cw(c1529.2,157.73) 1529.2,197.1 1844.16,197.1 cw(c1844.16,157.73) 1883.53,157.73 1883.53,39.62 ccw(c1922.9,39.62) 1922.9,0.25 3064.63,0.25 ccw(c3064.63,118.36) 3182.74,118.36 3182.74,275.84 ccw(c3064.63,275.84) 3064.63,393.95 2611.88,393.95 cw(c2611.88,512.06) 2493.77,512.06 2493.77,1732.53 ccw(c2375.66,1732.53) 2375.66,1850.64 1883.53,1850.64 ccw(c1883.53,1811.27) 1844.16,1811.27 1844.16,1771.9 cw(c1686.68,1771.9) 1529.2,1771.9 1529.2,1811.27 ccw(c1489.83,1811.27) 1489.83,1850.64 997.7,1850.64 ccw(c997.7,1732.53) 879.59,1732.53 879.59,512.06 cw(c761.48,512.06) 761.48,393.95 308.73,393.95 ccw(c308.73,275.84) 190.62,275.84
GND on Bottom Layer "Top Layer-No Net1" (hatched 90Degree grid 20 track 8, remove dead copper, pour order 1): 190.62,118.36 ccw(c308.73,118.36) 308.73,0.25 1450.46,0.25 ccw(c1450.46,39.62) 1489.83,39.62 1489.83,157.73 cw(c1529.2,157.73) 1529.2,197.1 1844.16,197.1 cw(c1844.16,157.73) 1883.53,157.73 1883.53,39.62 ccw(c1922.9,39.62) 1922.9,0.25 3064.63,0.25 ccw(c3064.63,118.36) 3182.74,118.36 3182.74,275.84 ccw(c3064.63,275.84) 3064.63,393.95 2611.88,393.95 cw(c2611.88,512.06) 2493.77,512.06 2493.77,1732.53 ccw(c2375.66,1732.53) 2375.66,1850.64 1883.53,1850.64 ccw(c1883.53,1811.27) 1844.16,1811.27 1844.16,1771.9 cw(c1686.68,1771.9) 1529.2,1771.9 1529.2,1811.27 ccw(c1489.83,1811.27) 1489.83,1850.64 997.7,1850.64 ccw(c997.7,1732.53) 879.59,1732.53 879.59,512.06 cw(c761.48,512.06) 761.48,393.95 308.73,393.95 ccw(c308.73,275.84) 190.62,275.84

## Keep-outs
Top Layer:
  circle w10: c1174.87,118.36 r118.13
  circle w10: c2198.49,118.36 r118.39
  circle w10: c308.73,275.84 r118.11
  circle w10: c3064.63,275.84 r118.11
  circle w10: c2375.66,1732.53 r118.11
  circle w10: c997.7,1732.53 r118.11
  lines w10: 190.62,117.36 ccw(c308.98,118.36) 309.98,0.01 ; 190.62,118.36 190.62,275.84 cw(c308.73,275.84) 308.73,393.95 761.48,393.95 ccw(c761.48,512.06) 879.59,512.06 879.59,1732.53 cw(c997.7,1732.53) 997.7,1850.64 1489.83,1850.64 cw(c1489.83,1811.27) 1529.2,1811.27 1529.2,1771.9 ccw(c1686.68,1771.9) 1844.16,1771.9 1844.16,1811.27 cw(c1883.53,1811.27) 1883.53,1850.64 2375.66,1850.64 cw(c2375.66,1732.53) 2493.77,1732.53 2493.77,513 ccw(c2612.35,512.53) 2611.88,393.95 3064.63,393.95 cw(c3064.63,275.84) 3182.74,275.84 3182.74,118.36 cw(c3064.63,118.36) 3064.63,0.25 1922.9,0.25 cw(c1922.9,39.62) 1883.53,39.62 1883.53,157.73 ccw(c1844.16,157.73) 1844.16,197.1 1529.2,197.1 ccw(c1529.2,157.73) 1489.83,157.73 1489.83,39.62 cw(c1450.46,39.62) 1450.46,0.25 308.98,0.25
Bottom Layer:
  circle w10: c308.73,275.84 r118.11
  circle w10: c1174.87,118.36 r118.13
  circle w10: c2198.49,118.36 r118.36
  circle w10: c3064.63,275.84 r118.11
  circle w10: c2375.66,1732.53 r118.11
  circle w10: c997.7,1732.53 r118.11
  lines w10: 190.62,275.84 190.62,118.36 ccw(c308.73,118.36) 308.73,0.25 1450.46,0.25 ccw(c1450.46,39.62) 1489.83,39.62 1489.83,157.73 cw(c1529.2,157.73) 1529.2,197.1 1844.16,197.1 cw(c1844.16,157.73) 1883.53,157.73 1883.53,39.62 ccw(c1922.08,38.54) 1921,0 ; 308.73,393.95 761.48,393.95 ccw(c761.48,512.06) 879.59,512.06 879.59,1732.53 ; 997.7,1850.64 1489.83,1850.64 cw(c1489.83,1811.27) 1529.2,1811.27 1529.2,1771.9 ccw(c1686.68,1771.9) 1844.16,1771.9 1844.16,1811.27 cw(c1883.53,1811.27) 1883.53,1850.64 2375.66,1850.64 ; 1922.9,0.25 3064.63,0.25 ccw(c3064.63,118.36) 3182.74,118.36 3182.74,275.84 ; 2493.77,512.06 2493.77,1732.53 ; 2493.77,513 ccw(c2612.35,512.53) 2611.88,393.95 3064.63,393.95

## Silkscreen, mask and mechanical layers (free items; w line width, h text height)
Top Overlay:
  circle w10: c2769.36,1103.48 r118.11
  circle w10: c3120.54,1694.03 r118.11
  circle w10: c604,1103.48 r118.11
  circle w10: c252.82,1694.03 r118.11
  circle w10: c308.73,275.84 r118.11
  circle w10: c1174.87,118.36 r118.11
  circle w10: c2198.49,118.36 r118.12
  circle w10: c3064.63,275.84 r118.11
  circle w10: c2375.66,1732.53 r118.11
  circle w10: c997.7,1732.53 r118.11
  lines w10: 643.37,1851.51 cw(c642.94,1732.97) 761.48,1732.53 761.48,1064.11 ; 643.37,1852.14 213.45,1852.14 ccw(c213.89,1733.6) 95.34,1733.16 95.34,1064.74 ccw(c213.77,1064.42) 213.45,946 643.37,946 ccw(c643.69,1064.42) 762.11,1064.11 ; 2611.25,1064.11 ccw(c2729.67,1064.42) 2729.99,946 3159.91,946 ccw(c3159.59,1064.42) 3278.02,1064.74 3278.02,1733.16 ccw(c3159.47,1733.6) 3159.91,1852.14 2729.99,1852.14 ; 2611.88,1064.11 2611.88,1732.53 cw(c2730.42,1732.97) 2729.99,1851.51 ; 771.72,2060.28 ccw(c889.83,2060.28) 889.83,1942.17 1489.83,1942.17 ccw(c1489.83,2060.28) 1607.94,2060.28 1607.94,2244.06 ccw(c1489.83,2244.06) 1489.83,2362.17 889.83,2362.17 ccw(c889.83,2244.06) 771.72,2244.06 771.72,2060.28 ; 1765.42,2060.28 ccw(c1883.53,2060.28) 1883.53,1942.17 2483.53,1942.17 ccw(c2483.53,2060.28) 2601.64,2060.28 2601.64,2244.06 ccw(c2483.53,2244.06) 2483.53,2362.17 1883.53,2362.17 ccw(c1883.53,2244.06) 1765.42,2244.06 1765.42,2060.28
Bottom Overlay:
  circle w10: c308.73,275.84 r118.11
  circle w10: c1174.87,118.36 r118.11
  circle w10: c2198.49,118.36 r118.36
  circle w10: c3064.63,275.84 r118.11
  circle w10: c2375.66,1732.53 r118.11
  circle w10: c997.7,1732.53 r118.11
  text "+" at 442,2232 h40
  text "+" at 2025,2019 h40
  text "+" at 1035,2013 h40
  text "+" at 1875,1611 h40
  text "+" at 2227,1609 h40
  text "+" at 1547,1604 h40
  text "+" at 1198,1471 h40
  text "+" at 3057,1369 h40
  text "+" at 567,1360 h40
  text "+" at 1202,1323 h40
  text "+" at 2359,1008 h40
  text "+" at 1201,931.43 h40
  text "+" at 1200,786 h40
  text "0" at 1211.91,642 h40
  text "+" at 2357,618 h40
  text "+" at 1078.89,594 h40
  text "1" at 1220,550 h40
  text "+" at 1210,481 h40
  text "+" at 1255,481 h40
  text "+" at 1828,324 h40
  text "+" at 2279,253 h40
  text "+" at 2072,200 h40
Mechanical 1:
  circle w10: c2375.66,1732.53 r62.99
  circle w10: c997.7,1732.53 r62.99
  circle w10: c3064.63,275.84 r62.99
  circle w10: c2198.49,118.36 r62.99
  circle w10: c1174.87,118.36 r62.99
  circle w10: c308.73,275.84 r62.99
  lines w10: 95.34,1064.74 95.34,1733.16 cw(c213.89,1732.97) 214.08,1851.51 643.37,1851.51 cw(c642.94,1732.97) 761.48,1732.53 879.59,1732.53 cw(c997.7,1732.53) 997.7,1850.64 1034.75,1850.64 1034.75,1942.17 889.83,1942.17 cw(c889.83,2060.28) 771.72,2060.28 771.72,2244.06 ; 95.34,1065 ccw(c213.9,1064.55) 213.45,946 643.37,946 ccw(c644.13,1064.87) 763,1064.11 ; 762.11,1064.11 879.49,1064.11 879.49,512.17 ; 771.72,2244 cw(c889.86,2244.03) 889.83,2362.17 1489.83,2362.17 cw(c1489.83,2244.06) 1607.94,2244.06 1607.94,2060.28 cw(c1489.83,2060.28) 1489.83,1942.17 1489.83,1850.64 cw(c1489.83,1811.27) 1529.2,1811.27 1529.2,1771.9 ccw(c1686.68,1771.9) 1844.16,1771.9 1844.16,1811.27 cw(c1883.53,1811.27) 1883.53,1850.64 1883.53,1942.17 cw(c1883.53,2060.28) 1765.42,2060.28 1765.42,2244.06 cw(c1883.53,2244.06) 1883.53,2362.17 2483.53,2362.17 cw(c2483.5,2244.03) 2601.64,2244 ; 879.59,512.06 cw(c761.48,512.06) 761.48,393.95 308.73,393.95 ccw(c308.73,275.84) 190.62,275.84 190.62,118.36 ccw(c308.73,118.36) 308.73,0.25 1450.46,0.25 ccw(c1450.46,39.62) 1489.83,39.62 1489.83,157.73 cw(c1529.2,157.73) 1529.2,197.1 1844.16,197.1 cw(c1844.16,157.73) 1883.53,157.73 1883.53,39.62 ccw(c1922.9,39.62) 1922.9,0.25 3064.63,0.25 ccw(c3064.63,118.36) 3182.74,118.36 3182.74,275.84 ccw(c3064.63,275.84) 3064.63,393.95 2611.88,393.95 cw(c2611.88,512.06) 2493.77,512.06 2493.77,1064 ; 2493.87,1064.11 2611.25,1064.11 ; 2601.64,2244.06 2601.64,2060.28 cw(c2483.53,2060.28) 2483.53,1942.17 2338.61,1942.17 2338.61,1850.64 2375.66,1850.64 cw(c2375.66,1732.53) 2493.77,1732.53 2611.88,1732.53 cw(c2730.42,1732.97) 2729.99,1851.51 3159.28,1851.51 cw(c3159.47,1732.97) 3278.02,1733.16 3278.02,1064.74 ; 2610.36,1064.11 ccw(c2729.23,1064.87) 2729.99,946 3159.91,946 ccw(c3159.46,1064.55) 3278.02,1065